# Altium PCB board.PcbDoc
Units mm, origin at the board's own origin, x right, y up, seen from the top; angles counter-clockwise.
Board outline 170 x 23.24 mm, 2 copper layers (Top Layer, Bottom Layer); 75 components, 36 nets, 289 pads, 344 vias.
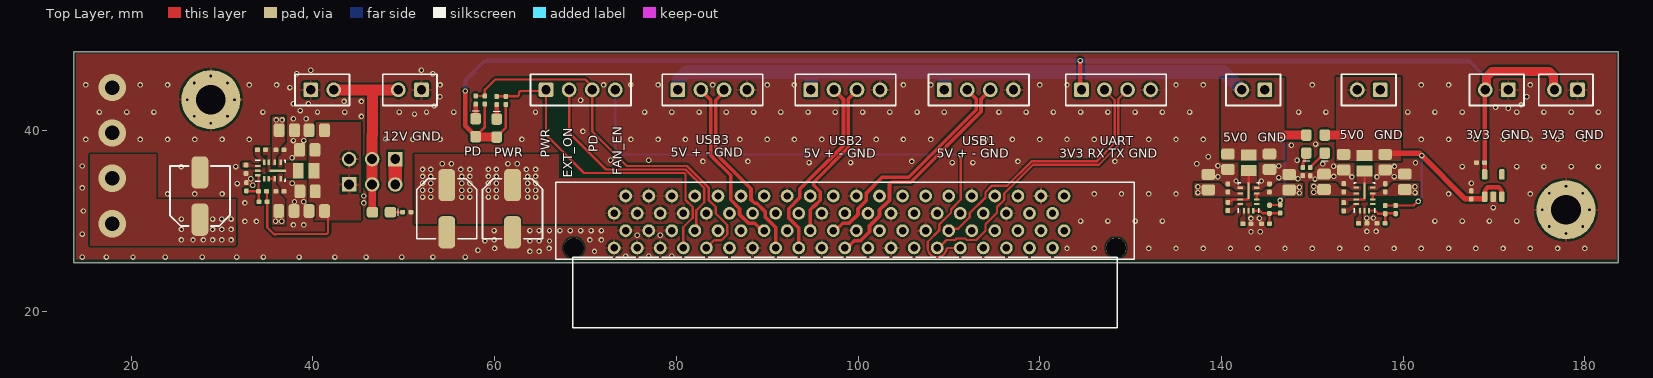
[diagram p0: Top Layer view]
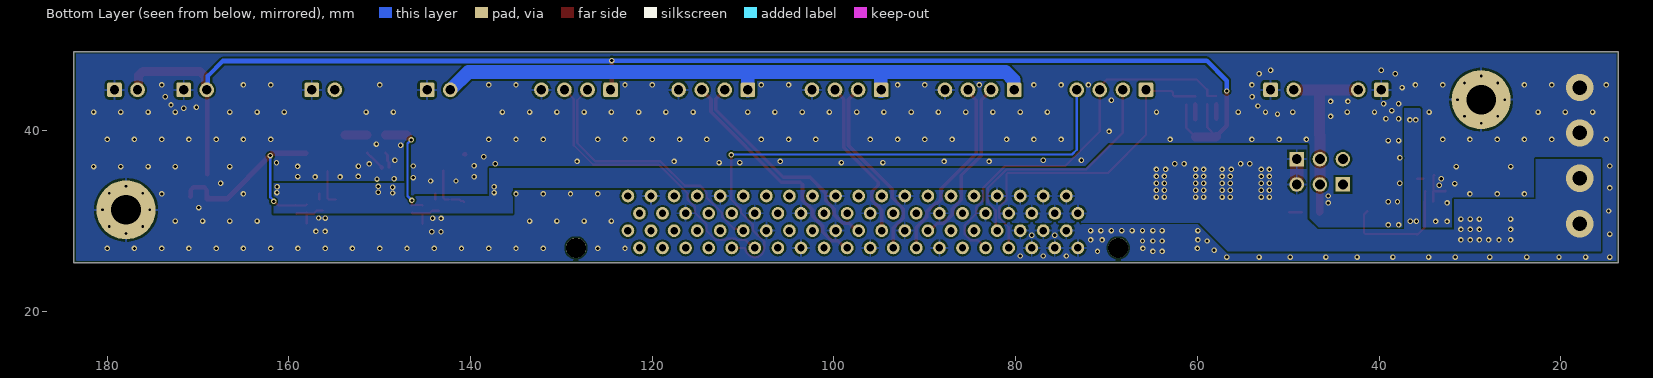
[diagram p1: Bottom Layer view, seen from below]
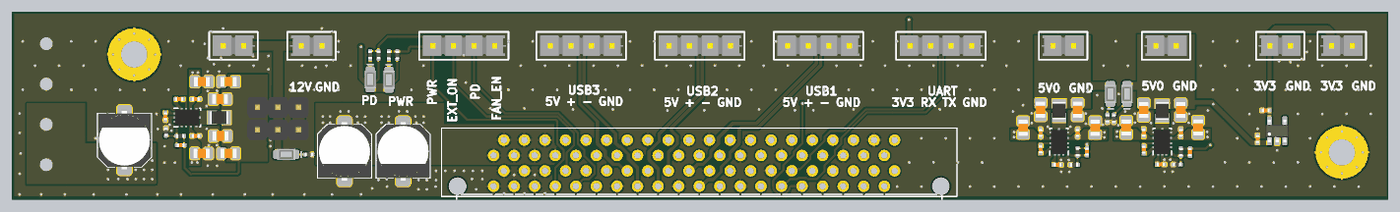
[diagram p2: 3D render of the assembled board from above, using the file's embedded part models]

## Layer stack, top to bottom
Top Solder: solder mask 0.0102, Solder Resist, Dk 3.5
Top Layer: signal copper 0.0356
Dielectric 1: dielectric 0.32, FR-4, Dk 4.8
Bottom Layer: signal copper 0.0356
Bottom Solder: solder mask 0.0102, Solder Resist, Dk 3.5

## Board outline
13.676,25.4 13.676,48.641 183.676,48.641 183.676,25.4

## Design rules (kind name [scope] priority, off if disabled: settings)
BoardOutlineClearance [All] p1: gap=0.2 ignorepadtopadclearanceinfootprint=FALSE except(0.4: Arc-SplitBarrior Arc-SplitContinuation Track-SplitBarrior Track-SplitContinuation SMDPad-SplitBarrior SMDPad-SplitContinuation THPad-SplitBarrior THPad-SplitContinuation Via-SplitBarrior Via-SplitContinuation Fill-SplitBarrior Fill-SplitContinuation Poly-SplitBarrior Poly-SplitContinuation Region-SplitBarrior Region-SplitContinuation Text-SplitBarrior Text-SplitContinuation)
Clearance "Clearance Bottom Layer" [OnLayer('Bottom Layer')] p1: gap=0.203 ignorepadtopadclearanceinfootprint=TRUE except(0.254: Arc-Text Track-Text SMDPad-Text THPad-Text Via-Text Fill-Text Poly-Text Region-Text Text-Text)
Clearance "Clearance Top Layer" [OnLayer('Top Layer')] p2: gap=0.203 ignorepadtopadclearanceinfootprint=TRUE except(0.127: Arc-Arc Arc-Track Track-Track; 0.254: Arc-Text Track-Text SMDPad-Text THPad-Text Via-Text Fill-Text Poly-Text Region-Text Text-Text)
Clearance [All] p3: gap=0.2 ignorepadtopadclearanceinfootprint=FALSE except(0.089: Arc-Arc Arc-Track Arc-SMDPad Track-Track Track-SMDPad SMDPad-SMDPad; 0.127: Arc-Via Track-Via SMDPad-Via THPad-Via Via-Via; 0.254: Arc-Text Track-Text SMDPad-Text THPad-Text Via-Text Fill-Text Poly-Text Region-Text Text-Text)
HoleSize [All] p1: absolutevalues=TRUE maxlimit=6.3 minlimit=0.2 maxpercent=80.000 minpercent=20.000
MinimumAnnularRing [All] p1: minimumring=0.076
MinimumSolderMaskSliver [All] p1: minsoldermaskwidth=0.1
PolygonConnect PolygonConnect_4 [All vs IsNamedPolygon('DIRCON')] p1: connectstyle=Direct reliefconductorwidth=0.254 reliefentries=4 polygonreliefangle="90 Angle" airgapwidth=0.254
PolygonConnect PolygonConnect_3 [All vs IsNamedPolygon('PWR_PLANE')] p2: thpad.connectstyle=Relief thpad.reliefconductorwidth=0.254 thpad.reliefentries=4 thpad.polygonreliefangle="90 Angle" thpad.airgapwidth=0.254 smdpad.connectstyle=Direct smdpad.reliefconductorwidth=0.254 smdpad.reliefentries=4 smdpad.polygonreliefangle="90 Angle" smdpad.airgapwidth=0.254 via.connectstyle=Direct via.reliefconductorwidth=0.254 via.reliefentries=4 via.polygonreliefangle="90 Angle" via.airgapwidth=0.254
PolygonConnect PolygonConnect_2 [All vs InNamedPolygon('PWR_PLANE')] p3: thpad.connectstyle=Relief thpad.reliefconductorwidth=0.254 thpad.reliefentries=4 thpad.polygonreliefangle="90 Angle" thpad.airgapwidth=0.254 smdpad.connectstyle=Direct smdpad.reliefconductorwidth=0.254 smdpad.reliefentries=4 smdpad.polygonreliefangle="90 Angle" smdpad.airgapwidth=0.254 via.connectstyle=Relief via.reliefconductorwidth=0.254 via.reliefentries=4 via.polygonreliefangle="90 Angle" via.airgapwidth=0.254
PolygonConnect [All] p4: connectstyle=Relief reliefconductorwidth=0.254 reliefentries=4 polygonreliefangle="90 Angle" airgapwidth=0.254
PolygonConnect PolygonConnect_1 [All vs InNamedPolygon('DIRCON')] p5: connectstyle=Direct reliefconductorwidth=0.508 reliefentries=4 polygonreliefangle="90 Angle" airgapwidth=0.254
RoutingCorners [All] p1: cornerstyle=Round minsetback=2.54 maxsetback=2.54
RoutingVias [All] p1: holewidth=0.5 width=1 viastyle="Through Hole" minholewidth=0.2 minwidth=0.45 maxholewidth=1 maxwidth=2
SilkToSilkClearance [All] p1: silktosilkclearance=0.1
SilkToSolderMaskClearance [IsPad] p1: minsilkscreentomaskgap=0.1 clearancetoexposedcopper=TRUE
SolderMaskExpansion [All] p1: expansion=0.102 istentingtop=FALSE
Width [All] p1: maxlimit=2.54 minlimit=0.089 preferedwidth=0.381
25 further rules are at their usual default settings.

## Components (designator, comment, footprint, x,y, rotation, side; value= is the part's Value field where it differs from the comment)
C1 "CAP MLCC 100nF 0402 10% 50V X5R" C0402N 153.456,31.576 r270 top
C2 "CAP MLCC 10uF 0805 10% 25V X5R" C0805N 160.177,34.336 r270 top
C3 "CAP MLCC 100nF 0402 10% 50V X5R" C0402N 153.456,33.677 r270 top
C4 "CAP MLCC 10uF 0805 10% 25V X5R" C0805N 151.297,34.331 r270 top
C5 "CAP MLCC 100nF 0402 10% 50V X5R" C0402N 158.028,33.666 r270 top
C6 "CAP MLCC 100nF 0402 10% 50V X5R" C0402N 159.171,31.264 r90 top
C7 "CAP MLCC 22uF 0805 10% 10V X5R" C0805N 153.456,36.49 r90 top
C8 "CAP MLCC 22uF 0805 10% 10V X5R" C0805N 158.028,36.49 r90 top
C9 "CAP MLCC 1uF 0402 10% 16V X5R" C0402N 155.558,29.752 r180 top
C10 "ECAP 100uF radial 20% 25V 0.7mohm" "New footprint 1"#1 54.737,31.369 r270 top
C11 "ECAP 100uF radial 20% 25V 0.7mohm" "New footprint 1"#1 27.559,32.766 r90 top
C12 "ECAP 100uF radial 20% 25V 0.7mohm" "New footprint 1"#1 61.976,31.369 r270 top
C13 "CAP MLCC 100nF 0402 10% 50V X5R" C0402N 140.716,31.622 r270 top
C14 "CAP MLCC 10uF 0805 10% 25V X5R" C0805N 138.557,34.289 r270 top
C15 "CAP MLCC 100nF 0402 10% 50V X5R" C0402N 140.716,33.654 r270 top
C16 "CAP MLCC 10uF 0805 10% 25V X5R" C0805N 147.447,34.289 r270 top
C17 "CAP MLCC 100nF 0402 10% 50V X5R" C0402N 145.288,33.654 r270 top
C18 "CAP MLCC 100nF 0402 10% 50V X5R" C0402N 146.454,31.335 r90 top
C19 "CAP MLCC 22uF 0805 10% 10V X5R" C0805N 145.288,36.536 r90 top
C20 "CAP MLCC 22uF 0805 10% 10V X5R" C0805N 140.716,36.536 r90 top
C21 "CAP MLCC 1uF 0402 10% 16V X5R" C0402N 142.806,29.718 r180 top
C22 "CAP MLCC 100nF 0402 10% 50V X5R" C0402N 34.329,37.846 r180 top
C23 "CAP MLCC 10uF 0805 10% 25V X5R" C0805N 37.123,40.005 r180 top
C24 "CAP MLCC 100nF 0402 10% 50V X5R" C0402N 36.361,37.846 r180 top
C25 "CAP MLCC 10uF 0805 10% 25V X5R" C0805N 37.084,31.115 r180 top
C26 "CAP MLCC 100nF 0402 10% 50V X5R" C0402N 36.361,33.274 r180 top
C27 "CAP MLCC 100nF 0402 10% 50V X5R" C0402N 34.514,32.131 r0 top
C28 "CAP MLCC 22uF 0805 10% 10V X5R" C0805N 39.37,37.846 r0 top
C29 "CAP MLCC 22uF 0805 10% 10V X5R" C0805N 39.409,33.274 r0 top
C30 "CAP MLCC 1uF 0402 10% 16V X5R" C0402N 32.633,35.708 r90 top
C31 "CAP MLCC 1uF 0402 10% 16V X5R" C0402N 167.513,32.893 r270 top
C32 "CAP MLCC 1uF 0402 10% 16V X5R" C0402N 168.529,36.449 r0 top
C33 "CAP MLCC 22uF 0805 10% 10V X5R" C0805N 40.425,31.115 r0 top
C34 "CAP MLCC 22uF 0805 10% 10V X5R" C0805N 40.425,40.005 r0 top
D1 "Hongbright_H2214AG72E0Z01" "New footprint 1"#2 151.384,38.481 r90 top
D2 "Hongbright_H2214AG72E0Z01" "New footprint 1"#2 149.352,38.481 r90 top
D3 "Hongbright_H2214AG72E0Z01" "New footprint 1"#2 47.537,30.988 r180 top
D4 "Hongbright_H2214AG72E0Z01" "New footprint 1"#2 57.912,40.285 r270 top
D5 "Hongbright_H2214AG72E0Z01" "New footprint 1"#2 60.223,40.242 r270 top
J1 "TX24-80R-LT-H1E" CON80_2X40_MR_TX24_JAE 98.552,25.908 r0 top
L1 "Inductor" INDC2016X10N 155.742,36.368 r90 top value="1.5 uH"
L2 "Inductor" INDC2016X10N 143.002,36.414 r90 top value="1.5 uH"
L3 "Inductor" INDC2016X10N 39.248,35.56 r0 top value=3.3uH
P1 "SAMTEC_TSW-102-07-F-S" SAMTEC-TSW-102-07-X-S 41.021,44.45 r0 top
P3 "SAMTEC_TSW-102-07-F-S" SAMTEC-TSW-102-07-X-S 50.671,44.45 r180 top
P6 "SAMTEC_TSW-102-07-F-S" SAMTEC-TSW-102-07-X-S 156.21,44.45 r180 top
P7 "WÜRTH_61300311121" 61300311121 46.521,36.83 r180 top
P8 "WÜRTH_61300311121" 61300311121 46.521,34.036 r0 top
P9 "SAMTEC_TSW-102-07-F-S" SAMTEC-TSW-102-07-X-S 143.51,44.45 r180 top
P11 "SAMTEC_TSW-104-07-F-S" SAMTEC-TSW-104-07-X-S 69.469,44.45 r0 top
P12 "SAMTEC_TSW-104-07-F-S" SAMTEC-TSW-104-07-X-S 113.291,44.45 r0 top
P13 "SAMTEC_TSW-104-07-F-S" SAMTEC-TSW-104-07-X-S 98.615,44.45 r0 top
P14 "SAMTEC_TSW-102-07-F-S" SAMTEC-TSW-102-07-X-S 177.927,44.45 r180 top
P15 "SAMTEC_TSW-104-07-F-S" SAMTEC-TSW-104-07-X-S 83.974,44.45 r0 top
P16 "SAMTEC_TSW-102-07-F-S" SAMTEC-TSW-102-07-X-S 170.307,44.45 r180 top
P17 "SAMTEC_TSW-104-07-F-S" SAMTEC-TSW-104-07-X-S 128.397,44.45 r0 top
R1 "RES 100k 0402 1% 63mW" R0402N 158.028,31.264 r90 top
R2 "RES 100k 0402 1% 63mW" R0402N 149.77,35.446 r90 top
R3 "RES 100k 0402 1% 63mW" R0402N 157.564,29.745 r0 top
R4 "RES 100k 0402 1% 63mW" R0402N 145.288,31.299 r90 top
R5 "RES 100k 0402 1% 63mW" R0402N 148.967,35.462 r90 top
R6 "RES 100k 0402 1% 63mW" R0402N 144.849,29.718 r0 top
R7 "RES 100k 0402 1% 63mW" R0402N 34.456,33.274 r0 top
R8 "RES 100k 0402 1% 63mW" R0402N 50.331,30.988 r180 top
R9 "RES 100k 0402 1% 63mW" R0402N 32.678,33.782 r270 top
R10 "RES 100k 0402 1% 63mW" R0402N 58.928,43.333 r270 top
R11 "RES 100k 0402 1% 63mW" R0402N 61.239,43.29 r270 top
R12 "RES 100k 0402 1% 63mW" R0402N 57.912,43.333 r270 top
R13 "RES 100k 0402 1% 63mW" R0402N 60.223,43.29 r270 top
U1 "Part Number: LMR33620ARNXR" RNX12 155.742,32.566 r0 top value=Value
U2 "Part Number: LMR33620ARNXR" RNX12 142.991,32.559 r0 top value=Value
U3 "Part Number: LMR33620ARNXR" RNX12 35.319,35.56 r270 top value=Value
U4 "TI_TLV75533PDBVR" SOT23-5P95_280X145L45X40N 169.926,33.909 r0 top
? "Comment" MTGP650H325V8H30 28.764,43.372 r0 top
? "Comment" MTGP650H325V8H30 177.927,31.242 r0 top

## Footprints (in the part's own frame and the unit in brackets; to place one, negate y for a bottom-side part, rotate by r counter-clockwise, add the part's x,y. Pads: shape width x height; smd on the part's side, far side on the other; paste and mask are expansions set on the pad)
61300311121 [mm] "Pin Header, pitch 2.54 mm, THT, Vertical, single row, 3p"
  rect 1.6x1.6 hole 1.1: 1(-2.54,0)
  round 1.6 hole 1.1: 2(0,0) 3(2.54,0)
  body extent -3.81,-1.27 3.81,1.27, height 8.57
C0402N [mm] "Capacitor, Chip; 1.00 mm L X 0.50 mm W X 0.60 mm H body"
  rrect50% 0.555x0.505 smd: 1(-0.45,0) 2(0.45,0)
  body extent -0.5,-0.25 0.5,0.25, height 0.6
C0805N [mm] "Capacitor, Chip; 2.00 mm L X 1.20 mm W X 1.52 mm H body"
  rrect42% 1.2x1.5 smd: 1(-0.85,0) 2(0.85,0)
  body extent -1,-0.6 1,0.6, height 1.52
CON80_2X40_MR_TX24_JAE [mil]
  round 55 hole 32 mask+0: 1(950,270) 2(900,195) 3(850,270) 4(800,195) 5(750,270) 6(700,195) 7(650,270) 8(600,195) 9(550,270) 10(500,195) 11(450,270) 12(400,195) 13(350,270) 14(300,195) 15(250,270) 16(200,195) 17(150,270) 18(100,195) 19(50,270) 20(0,195) 21(-50,270) 22(-100,195) 23(-150,270) 24(-200,195) 25(-250,270) 26(-300,195) 27(-350,270) 28(-400,195) 29(-450,270) 30(-500,195) 31(-550,270) 32(-600,195) 33(-650,270) 34(-700,195) 35(-750,270) 36(-800,195) 37(-850,270) 38(-900,195) 39(-950,270) 40(-1000,195) 41(950,120) 42(900,45) 43(850,120) 44(800,45) 45(750,120) 46(700,45) 47(650,120) 48(600,45) 49(550,120) 50(500,45) 51(450,120) 52(400,45) 53(350,120) 54(300,45) 55(250,120) 56(200,45) 57(150,120) 58(100,45) 59(50,120) 60(0,45) 61(-50,120) 62(-100,45) 63(-150,120) 64(-200,45) 65(-250,120) 66(-300,45) 67(-350,120) 68(-400,45) 69(-450,120) 70(-500,45) 71(-550,120) 72(-600,45) 73(-650,120) 74(-700,45) 75(-750,120) 76(-800,45) 77(-850,120) 78(-900,45) 79(-950,120) 80(-1000,45)
  round 87 hole 87 unplated: 81(-1175,45) 82(1175,45)
  silkscreen extent -1253,-300 1253,329, body extent 0,-10 10,0, height 10
INDC2016X10N [mm] "Chip Inductor, 2-Leads, Body 2,00x1,60mm, IPC Medium Density"
  rect 1.19x1.73 smd: 1(-0.855,0) 2(0.855,0)
  body extent -1.1,-0.81 1.1,0.81, height 1
MTGP650H325V8H30 [mm] "Mounting Hole, Plated; 6.50 mm Pad, 3.25 mm Hole (with 8 vias)"
  round 0.6 hole 0.301: 1(-2.6,0) 1(-1.84,-1.84) 1(-1.84,1.84) 1(0,-2.6) 1(0,2.6) 1(1.84,-1.84) 1(1.84,1.84) 1(2.6,0)
  round 6.5 hole 3.25 paste-6.5: 1(0,0)
"New footprint 1"#1 [mm]
  rrect50% 3.55x1.85 smd: 1(-2.6,0) 2(2.6,0)
  silkscreen extent -3.3,-3.3 3.3,3.3, body extent -3.6,-3.3 3.6,3.3, height 8
"New footprint 1"#2 [mm]
  rrect43% 1.25x1.16 smd: 1(0.99,0) 2(-0.99,0)
  silkscreen extent -1.84,-0.38 -1.84,0.38, body extent -1.1,-0.7 1.1,0.7, height 1.28
R0402N [mm] "Resistor, Chip; 1.00 mm L X 0.50 mm W X 0.40 mm H body"
  rrect50% 0.555x0.505 smd: 1(-0.45,0) 2(0.45,0)
  body extent -0.5,-0.25 0.5,0.25, height 0.4
RNX12 [mm] "RNX0012B"
  rect 0.6x0.25 smd paste+0 mask+0: 1(-0.9,1.125) 2(-0.9,0.475) 3(-0.9,-0.175) 4(-0.9,-0.675) 8(0.9,-0.675) 9(0.9,-0.175) 10(0.9,0.475) 11(0.9,1.125)
  rect 0.25x0.6 smd paste+0 mask+0: 5(-0.5,-1.4) 6(0,-1.4) 7(0.5,-1.4)
  rect 0.25x1.825 smd paste-0.9 mask+0: 12(0,0.788)
  silkscreen extent -1.14,-1.65 1.14,1.65, body extent -1.02,-1.52 0.98,1.48, height 0.91
SAMTEC-TSW-102-07-X-S [mm] "PCB Header Strips, 2-Leads, Body 5,08x2,54mm, 0.100\" pitch"
  rrect25% 1.62x1.62 hole 1.02: 1(-1.27,0)
  round 1.62 hole 1.02: 2(1.27,0)
  silkscreen extent -2.99,-1.72 2.99,1.72, body extent -2.54,-1.27 2.67,1.27, height 8.38
SAMTEC-TSW-104-07-X-S [mm] "PCB Header Strips, 4-Leads, Body 10,16x2,54mm, 0.100\" pitch"
  rrect25% 1.62x1.62 hole 1.02: 1(-3.81,0)
  round 1.62 hole 1.02: 2(-1.27,0) 3(1.27,0) 4(3.81,0)
  silkscreen extent -5.53,-1.72 5.53,1.72, body extent -5.08,-1.27 5.21,1.27, height 8.38
SOT23-5P95_280X145L45X40N [mm] "Small Outline Transistor (SOT23), 0.95 mm pitch; 5 pin, 2.90 mm L X 1.60 mm W X 1.45 mm H body"
  rrect49% 0.61x1.16 smd: 1(-0.95,-1.23) 2(0,-1.23) 3(0.95,-1.23) 4(0.95,1.23) 5(-0.95,1.23)
  body extent -1.45,-1.4 1.45,1.4, height 1.45

## Part data
C1 C6 C13 C18 C22 C27: library part CMP-02799-2, "Capacitor, MLCC, 100nF, 0402, 10%, 50V, X5R", Component Tolerance=10%, Component Value=100nF, Dielectric=X5R, Operating Temperature (°C)="-55 to +85", Package=0402, Voltage Rating=50V, TC ID=50021748
C2 C4 C14 C16 C23 C25: library part CMP-02808-3, "Capacitor, MLCC, 10uF, 0805, 10%, 25V, X5R", Component Tolerance=10%, Component Value=10µF, Dielectric=X5R, Operating Temperature (°C)="-55 to +85", Package=0805, Voltage Rating=25V, TC ID=50016549
C3 C5 C15 C17 C24 C26: library part CMP-02799-2, "Capacitor, MLCC, 100nF, 0402, 10%, 50V, X5R", Component Tolerance=10%, Component Value=220nF, Dielectric=X5R, Operating Temperature (°C)="-55 to +85", Package=0402, Voltage Rating=50V, TC ID=50021748
C7 C8 C19 C20: library part CMP-02864-4, "Capacitor, MLCC, 22uF, 0805, 10%, 10V, X5R", Component Tolerance=10%, Component Value=22µF, Dielectric=X5R, Operating Temperature (°C)="-55 to +85", Package=0805, Voltage Rating=10V, TC ID=50024017
C9 C21 C30 C31 C32: library part CMP-02807-3, "Capacitor, MLCC, 1uF, 0402, 10%, 16V, X5R", Component Tolerance=10%, Component Value=1µF, Dielectric=X5R, Operating Temperature (°C)="-55 to +125", Package=0402, Voltage Rating=16V, TC ID=50021750
C10 C11 C12: library part CMP-02868-3, "Electrolytic capacitor, 100uF, radial, 20%, 25V, 0.7mohm", Component Tolerance=20%, Component Value=100µF, Manufacturer 1=Rubycon, Manufacturer Part Number 1=25TRV100M6.3X8, Operating Temperature (°C)="-40 to +105", Voltage Rating=25V, Datasheet=http://www.rubycon.co.jp/en/catalog/e_pdfs/aluminum/e_TRV.pdf, TC ID=50020370
C28 C29 C33 C34: library part CMP-02864-4, "Capacitor, MLCC, 22uF, 0805, 10%, 10V, X5R", Component Tolerance=10%, Component Value=10uF, Dielectric=X5R, Operating Temperature (°C)="-55 to +85", Package=0805, Voltage Rating=10V, TC ID=50024017
D1 D2 D3 D4 D5: library part CMP-004-00012-6, "Green LED, VFmax 3.6V", Manufacturer 1=Hongbright, Manufacturer Part Number 1=H2214AG72E0Z01, Operating Temperature (°C)="-40 to +100"
J1: "No Description Available", Built_By=EMA_UL_Team, Copyright="Copyright (C) 2018 Accelerated Designs. All rights reserved", Manufacturer_Part_Number=TX24-80R-LT-H1E, RefDes=RefDes, SourceLibrary=JAE_2009-02-18, Type=DEV, Vendor="JAE Electronics"
P1 P3 P6 P9 P14 P16: library part CMP-03065-1, "CONN HEADER VERT 2POS 2.54MM", Manufacturer 1="Samtec Inc.", Manufacturer Part Number 1=TSW-102-07-F-S, Operating Temperature (°C)="-55 to +125", Datasheet=http://suddendocs.samtec.com/catalog_english/tsw_th.pdf, TC ID=50025272
P7 P8: library part CMP-018-0014-3, "Board Connector, 3 Contact(s), 1 Row(s), Male, Straight, 0.1 inch Pitch, Solder Terminal, Locking, Black Insulator, Plug", Manufacturer 1=Würth, Manufacturer Part Number 1=61300311121, Operating Temperature (°C)="-40 to +125"
P11 P12 P13 P15 P17: library part CMP-03066-1, "CONN HEADER VERT 4POS 2.54MM", Manufacturer 1="Samtec Inc.", Manufacturer Part Number 1=TSW-104-07-F-S, Operating Temperature (°C)="-55 to +125", Datasheet=http://suddendocs.samtec.com/catalog_english/tsw_th.pdf, TC ID=50025274
R1 R4 R7: library part CMP-02821-5, "Resistor, 100k, 0402, 1%, 63mW", Component Tolerance=1%, Component Value=100k, Operating Temperature (°C)="-55 to +125", Package=0402, Power Rating=63mW, TC ID=50020637
R2 R5 R12 R13: library part CMP-02821-5, "Resistor, 100k, 0402, 1%, 63mW", Component Tolerance=1%, Component Value=200, Operating Temperature (°C)="-55 to +125", Package=0402, Power Rating=63mW, TC ID=50020637
R3 R6: library part CMP-02821-5, "Resistor, 100k, 0402, 1%, 63mW", Component Tolerance=1%, Component Value=43.2k, Operating Temperature (°C)="-55 to +125", Package=0402, Power Rating=63mW, TC ID=50020637
R8: library part CMP-02821-5, "Resistor, 100k, 0402, 1%, 63mW", Component Tolerance=1%, Component Value=800, Operating Temperature (°C)="-55 to +125", Package=0402, Power Rating=63mW, TC ID=50020637
R9: library part CMP-02821-5, "Resistor, 100k, 0402, 1%, 63mW", Component Tolerance=1%, Component Value=9.09k, Operating Temperature (°C)="-55 to +125", Package=0402, Power Rating=63mW, TC ID=50020637
R10 R11: library part CMP-02821-5, "Resistor, 100k, 0402, 1%, 63mW", Component Tolerance=1%, Component Value=10k, Operating Temperature (°C)="-55 to +125", Package=0402, Power Rating=63mW, TC ID=50020637
U1 U2 U3: library part LMR33620, "SIMPLE SWITCHER® 3.8V to 36V, 2A Synchronous Buck Converter With Ultra-Low EMI", Manufacturer="Texas Instruments", PartNumber=LMR33620ARNXR, RefDes=RefDes, Type=TYPE
U4: library part CMP-02789-4, "Fixed Positive LDO Regulator, 3.3V, 0.238V Dropout, PDSO5", Manufacturer 1="Texas Instruments", Manufacturer Part Number 1=TLV75533PDBVR, Operating Temperature (°C)="-40 to +125", Package=SOT-23-5, TC ID=50021849
L1 L2 L3: Code_IEC=1005, Code_JEITA=0402, LatestRevisionDate=29-May-2009, LatestRevisionNote="IPC-7351 Footprint Added.", PackageDescription="Chip Inductor", PackageReference=0402-A, Published=8-Jun-2000, Publisher="Altium Limited"

## Via types
v1: diameter 0.6, hole 0.35, Top Layer to Bottom Layer, tented both sides, 340 vias
v2: diameter 3, hole 1.6, Top Layer to Bottom Layer, 4 vias

## Nets (pads, with @x,y where several pads share a name; then routed paths per layer and width w, separated by ;. In a path a pad name is that pad's centre, name@x,y a point inside that pad or via, vN(x,y) a via of type N, cw(c..) or ccw(c..) an arc to the next point about the centre after c; other vN are vias at no path point)
GND: ?.1 C2.1 C3.1 C4.1 C5.1 C7.1 C8.1 C9.1 C10.2 C11.2 C12.2 C14.1 C15.1 C16.1 C17.1 C19.1 C20.1 C21.1 C23.1 C24.1 C25.1 C26.1 C28.1 C29.1 C30.1 C31.1 C32.1 C33.1 C34.1 J1.3 J1.6 J1.9 J1.12 J1.16 J1.19 J1.22 J1.25 J1.28 J1.32 J1.53 J1.56 J1.59 J1.62 J1.65 J1.68 J1.75 J1.76 J1.77 J1.78 J1.79 J1.80 P1.1 P3.1 P6.1 P9.1 P12.4 P13.4 P14.1 P15.4 P16.1 P17.4 R2.1 R3.1 R5.1 R6.1 R8.1 R9.1 U1.1 U1.6 U1.11 U2.1 U2.6 U2.11 U3.1 U3.6 U3.11 U4.2
  other v1: 14.605,26.035 17.272,26.035 20.193,26.035 23.749,26.035 27.813,26.035 31.623,26.035 34.544,26.035 38.481,26.035 42.418,26.035 45.847,26.035 49.784,26.035 53.213,26.035 56.769,26.035 74.422,26.162 76.962,26.162 79.502,26.162 63.881,26.67 64.897,26.67 70.993,26.67 58.166,26.797 60,27 66,27 123,27 126,27 132,27 135,27 138,27 141,27 144,27 147,27 150,27 153,27 156,27 159,27 162,27 165,27 168,27 171,27 174,27 177,27 180,27 58.928,27.813 63.881,27.813 64.897,27.813 66.04,27.813 59.944,27.94 70.485,27.94 71.755,27.94 75.692,28.448 78.232,28.448 14.605,28.575 143.256,28.829 144.272,28.829 156.008,28.863 157.024,28.863 59.944,28.956 63.881,28.956 64.897,28.956 66.04,28.956 67.183,28.956 68.326,28.956 69.469,28.956 70.612,28.956 71.755,28.956 37.846,29.591 38.989,29.591 32.512,29.972 33.782,29.972 124.5,30 127.5,30 130.5,30 133.5,30 163.5,30 166.5,30 169.5,30 172.5,30 143.242,30.307 144.175,30.326 155.994,30.342 156.724,30.344 14.732,31.115 169.926,31.496 32.512,32.004 45.593,32.004 37.973,32.131 38.989,32.131 45.593,32.766 24,33 27,33 30,33 126,33 129,33 132,33 135,33 165,33 174,33 14.605,33.655 33.367,33.945 31.676,34.138 37.719,34.163 167.513,34.163 141.605,34.417 144.399,34.417 150.298,34.621 148.416,34.657 33.147,34.671 146.304,34.798 157.12,34.861 139.606,34.881 154.363,34.874 159.025,34.901 152.364,34.928 25.5,36 31.5,36 166.5,36 172.5,36 175.5,36 178.5,36 181.5,36 159.044,36.022 152.346,36.048 14.605,36.068 146.304,36.068 139.606,36.094 151.152,36.3 137.287,36.322 161.362,36.436 94.615,36.449 99.187,36.449 110.363,36.449 112.649,36.449 82.931,36.576 87.884,36.576 105.918,36.576 117.602,36.576 128.27,36.576 72.771,36.703 76.962,36.703 148.336,36.703 37.699,36.97 138.557,37.084 147.701,38.354 150.368,38.481 37.846,38.862 38.989,38.862 15,39 21,39 24,39 27,39 30,39 33,39 48,39 51,39 54,39 63,39 75,39 78,39 81,39 87,39 90,39 93,39 96,39 102,39 105,39 108,39 114,39 117,39 120,39 123,39 126,39 132,39 135,39 138,39 162,39 165,39 168,39 171,39 174,39 177,39 180,39 69.723,39.878 37.846,41.275 39.243,41.275 45.339,41.529 51.181,41.783 16.5,42 19.5,42 22.5,42 34.5,42 40.5,42 43.5,42 49.5,42 52.5,42 55.5,42 64.5,42 76.5,42 79.5,42 82.5,42 85.5,42 88.5,42 91.5,42 94.5,42 97.5,42 100.5,42 103.5,42 106.5,42 109.5,42 115.5,42 118.5,42 121.5,42 124.5,42 127.5,42 130.5,42 133.5,42 136.5,42 148.5,42 151.5,42 160.5,42 163.5,42 166.5,42 172.5,42 175.5,42 178.5,42 181.5,42 38.608,42.164 171.577,42.418 170.18,42.545 53.34,42.672 172.974,42.799 37.846,42.926 39.497,42.926 43.434,43.18 45.339,43.18 69.469,43.307 53.975,43.688 173.609,43.688 37.465,44.704 15,45 21,45 24,45 33,45 36,45 54,45 72,45 75,45 78,45 84,45 90,45 93,45 105,45 108,45 120,45 123,45 135,45 138,45 150,45 162,45 165,45 174,45 38.227,46.228 53.213,46.228 39.751,46.609 51.943,46.609
  other v2: 17.907,39.709 17.907,44.704
NetC1_1: C1.1 L1.1 U1.3 U1.12 | length 3.9
  Top Layer w0.254: U1.3 155.592,32.391 155.74,32.54 155.74,33.352 U1.12 L1.1
NetC1_2: C1.2 U1.4
NetC6_1: C6.1 R1.1 R3.2 U1.7 | length 4.3
  Top Layer w0.254: U1.7 156.921,31.166 157.273,30.814 R1.1 158.075,30.861 159.125,30.861 C6.1 ; R3.2 158.021,29.752 R1.1@158.021,30.934
NetC9_2: C9.2 U1.5
NetC13_1: C13.1 L2.1 U2.3 U2.12 | length 5.2
  Top Layer w0.254: C13.1 140.716,32.097 140.842,32.223 141.062,32.223 141.223,32.384 U2.3 ; U2.3@142.367,32.39 142.842,32.39 142.991,32.539 142.991,34.131 143.002,34.142 L2.1
NetC13_2: C13.2 U2.4
NetC18_1: C18.1 R4.1 R6.2 U2.7 | length 4.2
  Top Layer w0.254: U2.7 144.228,31.159 144.526,30.861 145.276,30.861 R4.1 ; R6.2 145.293,29.723 145.293,30.844 R4.1 ; C18.1@146.431,30.918 146.397,30.884 145.323,30.884 R4.1
NetC21_2: C21.2 U2.5
NetC22_1: C22.1 L3.1 U3.3 U3.12
NetC22_2: C22.2 U3.4
NetC27_1: C27.1 R7.1 R9.2 U3.7 | length 4.4
  Top Layer w0.254: R9.2 32.707,33.303 33.977,33.303 R7.1 ; U3.7 34.004,35.06 34.006,35.058 R7.1 ; C27.1 34.035,32.16 34.035,33.245 R7.1
NetC27_2: C27.2 C28.2 C29.2 C33.2 C34.2 L3.2 P7.3 P8.1 R7.2 | length 13.6
  Top Layer w0.254: R7.2 34.935,33.245 34.935,32.16 C27.2 34.964,31.242 34.964,29.298 35.709,28.553 35.919,28.553 35.941,28.575 41.507,28.575 41.656,28.724 41.656,30.734 C33.2
NetC30_2: C30.2 U3.5
NetD1_2: D1.2 R2.2 | length 2.3
  Top Layer w0.3: R2.2 149.77,35.905 149.77,35.921 150.926,37.077 150.97,37.077 D1.2
  Top Layer w0.5: R2.2@149.767,35.907 R2.2@149.77,35.905
NetD2_2: D2.2 R5.2 | length 1.7
  Top Layer w0.3: R5.2 148.967,36.036 148.971,36.04 148.971,36.449 149.135,36.613 149.135,37.274 D2.2
NetD3_2: D3.2 R8.2 | length 1.4
  Top Layer w0.254: D3.2 R8.2
NetD4_2: D4.2 R12.2 | length 1.6
  Top Layer w0.5: D4.2 R12.2
NetD5_2: D5.2 R13.2 | length 1.6
  Top Layer w0.5: D5.2 R13.2
NetJ1_50: J1.50 P11.4 | length 61.3
  Top Layer w0.254: J1.50 109.864,27.051 109.79,26.977 109.732,26.919 cw(c108.712,27.051) 107.685,26.992 ccw(c107.431,26.976) 107.684,27 107.675,27.094 cw(c107.928,27.118) 107.674,27.116 107.674,27.733 108.953,29.012 108.953,29.647 110.223,30.917 110.223,31.287 111.309,32.373 v1(111.309,37.29)
  Bottom Layer w0.254: P11.4 73.279,37.846 73.787,37.338 111.261,37.338 v1(111.309,37.29)
NetJ1_51: J1.51 P17.2 | length 29.2
  Top Layer w0.254: J1.51 110.201,29.175 111.021,29.175 112.281,30.435 112.281,30.874 114.023,32.616 114.023,33.182 114.75,33.909 116.428,33.909 119.095,36.576 126.238,36.576 128.27,38.608 128.27,43.307 P17.2
NetJ1_52: J1.52 P17.3 | length 32.5
  Top Layer w0.254: J1.52 108.87,27.051 109.746,27.927 110.673,27.927 110.826,28.08 111.811,28.08 111.963,27.927 113.017,27.927 114.033,28.943 114.033,29.647 115.303,30.917 115.303,31.552 116.091,32.34 116.091,33.033 119.253,36.195 126.492,36.195 128.651,38.354 128.651,43.434 P17.3
NetJ1_60: J1.60 P12.3 | length 25.8
  Top Layer w0.4: J1.60 98.782,27.051 99.585,27.854 100.278,27.854 101.26,28.836 101.26,29.471 102.362,30.573 102.362,31.242 102.784,31.664 102.818,31.664 103.464,32.31 103.464,34.056 103.698,34.29 105.791,34.29 113.538,42.037 113.538,43.427 P12.3
NetJ1_61: J1.61 P12.2 | length 24.7
  Top Layer w0.4: J1.61 97.512,28.956 98.315,29.759 99.008,29.759 99.99,30.741 99.99,31.376 100.924,32.31 100.924,33.106 102.635,34.817 105.573,34.817 113.011,42.255 113.011,43.446 112.021,44.437 P12.2
NetJ1_63: J1.63 P13.3 | length 18.2
  Top Layer w0.4: J1.63 94.742,31.242 95.164,31.664 95.198,31.664 95.844,32.31 95.844,33.222 95.115,33.951 95.115,34.282 98.933,38.1 98.933,43.434 99.885,44.386 P13.3
NetJ1_64: J1.64 P13.2 | length 20.8
  Top Layer w0.4: J1.64 93.472,29.244 92.37,30.346 92.37,31.376 93.599,32.605 93.599,33.528 98.406,38.335 98.406,43.389 P13.2
NetJ1_66: J1.66 P15.3 | length 20.6
  Top Layer w0.4: P15.3 85.244,44.223 84.328,43.307 84.328,37.448 88.224,33.553 88.224,32.385 88.646,31.963 88.848,31.963 89.806,31.005 89.806,30.429 90.932,29.303 J1.66
NetJ1_67: J1.67 P15.2 | length 18.7
  Top Layer w0.4: P15.2@82.804,44.323 83.801,43.326 83.801,37.23 85.979,35.052 85.979,32.351 86.954,31.376 86.954,30.741 87.936,29.759 88.629,29.759 89.432,28.956 J1.67
NetJ1_72: J1.72 P11.3 R10.1 R12.1 | length 43.5
  Top Layer w0.254: R12.1 R10.1 58.928,44.45 60.071,45.593 69.977,45.593 70.157,45.413 70.157,45.402 70.739,44.82 P11.3 70.739,39.878 74.549,36.068 81.18,36.068 83.553,33.695 83.553,32.34 84.341,31.552 84.341,30.848 85.611,29.578 85.611,28.53 84.981,27.9 84.161,27.9 J1.72
NetJ1_73: J1.73 P11.2 | length 27.2
  Top Layer w0.254: P11.2 68.199,39.751 72.263,35.687 81.022,35.687 83.071,33.639 83.071,32.075 82.182,31.186 82.182,29.096 J1.73
NetJ1_74: J1.74 P11.1 R11.1 R13.1 | length 36.8
  Top Layer w0.254: R13.1 R11.1 62.537,43.74 62.686,43.889 62.686,44.174 62.835,44.323 P11.1@65.659,44.323 ; P11.1 P11.1@65.659,44.323 ; J1.74 80.772,29.337 81.801,30.366 81.801,31.552 81.013,32.34 81.013,35.157 80.865,35.306 69.85,35.306 65.659,39.497 P11.1@65.659,44.323
VDD_3V3: C32.2 D4.1 D5.1 P14.2 P16.2 P17.1 R10.2 R11.2 U4.5 | length 155.9
  Top Layer w0.254: D4.1 57.912,39.34 58.928,40.356 R10.2 ; D5.1@60.202,39.273 61.239,40.311 R11.2
  Top Layer w0.5: v1(56.769,44.323) 56.769,40.483 D4.1@57.912,39.34 ; v1(124.46,47.675) 124.479,47.656 124.479,44.558 P17.1 ; U4.5 C32.2@168.976,36.573 ; C32.2 169.004,36.449 169.006,36.452 169.006,44.419 P16.2
  Top Layer w1: D4.1 57.934,39.273 60.202,39.273 D5.1 ; P16.2 169.156,44.569 169.156,45.839 169.799,46.482 176.071,46.482 176.538,46.015 176.538,44.569 P14.2
  Bottom Layer w0.5: v1@56.796,44.323 v1(56.769,44.323) 56.769,45.466 58.978,47.675 v1(124.46,47.675) ; v1@124.46,47.625 167.259,47.625 168.91,45.974 168.91,44.577 P16.2
VDD_5V_1: C6.2 C7.2 C8.2 C31.2 D1.1 L1.2 P6.2 R1.2 U4.1 U4.3 | length 28.3
  Top Layer w0.254: R1.2@158.028,31.841 158.028,31.84 158.154,31.714 C6.2 ; C8.2 C8.2@158.138,37.45 ; C6.2@159.263,31.75 159.263,31.749 159.297,31.714 161.155,31.714 161.605,32.164 v1(161.668,32.164)
  Top Layer w0.5: U4.1 169.031,32.734 169.031,33.419 169.324,33.712 170.528,33.712 170.821,33.419 170.821,32.734 U4.3
  Top Layer w0.6: C8.2@158.138,37.45 161.813,37.45 v1(162.052,37.211) 166.82,32.443 C31.2 168.971,32.443 168.976,32.448 U4.1
  Top Layer w1: D1.1 153.771,39.471 153.797,39.497
  Bottom Layer w0.254: v1(161.668,32.164) 161.668,32.258 162.052,32.642 v1(162.052,37.211)
VDD_5V_2: C18.2 C19.2 C20.2 D2.1 L2.2 P9.2 P12.1 P13.1 P15.1 R4.2 | length 79.2
  Top Layer w0.254: R4.2 145.323,31.784 146.397,31.784 146.431,31.818 C18.2@146.452,31.797 ; v1(146.452,32.281) C18.2@146.452,31.797 ; C18.2 146.452,31.787 C18.2@146.452,31.797 ; C18.2@146.499,31.75 C18.2@146.452,31.797 ; D2.1@149.352,39.426 D2.1
  Top Layer w0.5: C20.2@140.565,37.386 C20.2
  Top Layer w1: 146.939,39.37 147.04,39.471 D2.1
  Bottom Layer w0.254: v1(146.452,32.281) 146.939,32.768 146.939,38.533 v1(146.531,38.941)
  Bottom Layer w1.5: P15.1 80.224,44.51 80.224,45.543 81.103,46.422 94.866,46.422 ; P13.1@94.805,44.314 94.866,44.374 94.866,46.422 ; P12.1@109.474,44.333 109.474,45.603 ; P9.2 142.208,44.45 140.236,46.422 94.866,46.422
VDD_12V: D3.1 P1.2 P3.2 P7.2 P8.2 | length 20.6
  Top Layer w0.8: P8.2 46.534,34.023 46.534,31.001 D3.1
  Top Layer w1.2: P1.2@42.291,44.441 46.609,44.441 ; P8.2 P7.2 46.521,39.476 46.542,39.497 46.547,39.497 46.547,44.379 46.609,44.441 ; P3.2@49.401,44.441 46.609,44.441
VDD_IN: C2.2 C3.2 C4.2 C5.2 C10.1 C11.1 C12.1 C14.2 C15.2 C16.2 C17.2 C23.2 C24.2 C25.2 C26.2 J1.33 J1.34 J1.35 J1.36 J1.37 J1.38 J1.39 J1.40 P7.1 P8.3 U1.2 U1.9 U1.10 U2.2 U2.9 U2.10 U3.2 U3.9 U3.10 | length 4.7
  Top Layer w0.254: U3.9 U3.10 ; U2.9 U2.10 ; U1.9 U1.10
  Top Layer w1.5: P8.3 P7.1
  other v1: 25.527,27.94 26.797,27.94 27.94,27.94 28.956,27.94 29.972,27.94 30.988,27.94 25.527,29.083 28.956,29.083 29.972,29.083 30.988,29.083 36.558,29.98 35.889,29.996 25.527,30.226 28.956,30.226 29.972,30.226 30.988,30.226 52.07,32.639 52.959,32.639 56.388,32.639 57.277,32.639 59.309,32.639 60.198,32.639 63.627,32.639 64.516,32.639 148.59,33.097 137.414,33.147 161.32,33.143 150.154,33.189 52.07,33.401 52.959,33.401 56.388,33.401 57.277,33.401 59.309,33.401 60.198,33.401 63.627,33.401 64.516,33.401 148.59,33.732 137.414,33.782 161.29,33.782 150.154,33.824 52.07,34.163 52.959,34.163 56.388,34.163 57.277,34.163 59.309,34.163 60.198,34.163 63.627,34.163 64.516,34.163 52.07,34.925 52.959,34.925 56.388,34.925 57.277,34.925 59.309,34.925 60.198,34.925 63.627,34.925 64.516,34.925 52.07,35.687 52.959,35.687 56.261,35.687 57.277,35.687 59.309,35.687 60.198,35.687 63.5,35.687 64.516,35.687 54.229,36.322 55.245,36.322 61.468,36.322 62.484,36.322 35.969,41.146 36.604,41.146
  other v2: 17.907,29.718 17.907,34.713
pads on no net: J1.1 J1.2 J1.4 J1.5 J1.7 J1.8 J1.10 J1.11 J1.13 J1.14 J1.15 J1.17 J1.18 J1.20 J1.21 J1.23 J1.24 J1.26 J1.27 J1.29 J1.30 J1.31 J1.41 J1.42 J1.43 J1.44 J1.45 J1.46 J1.47 J1.48 J1.49 J1.54 J1.55 J1.57 J1.58 J1.69 J1.70 J1.71 J1.81 J1.82 U1.8 U2.8 U3.8 U4.4

## Polygon pours and split planes (outlines as drawn)
GND on Top Layer "PWR_PLANE" (solid, remove dead copper, pour order 28): 13.97,48.641 183.515,48.641 183.515,25.824 183.472,25.781 13.97,25.781
VDD_IN on Top Layer "PWR_PLANE" (solid, pour order 24): 15.494,37.338 22.733,37.338 22.733,32.385 31.479,32.385 31.492,27.305 15.494,27.305
VDD_IN on Top Layer "PWR_PLANE" (solid, pour order 26): 51.181,37.338 67.056,37.338 67.056,34.738 83.185,34.738 83.185,29.718 51.181,29.718
NetC27_2 on Top Layer "PWR_PLANE" (solid, pour order 23): 39.536,30.099 39.536,40.894 45.251,40.894 45.251,30.099
NetC22_1 on Top Layer "PWR_PLANE" (solid, pour order 22): 38.396,36.424 36.872,36.424 36.872,34.694 38.396,34.694
NetC30_2 on Top Layer "DIRCON" (solid, pour order 21): 34.234,36.181 34.234,35.928 32.227,35.928 32.227,36.464 33.086,36.464 33.369,36.181
NetC22_2 on Top Layer "DIRCON" (solid, pour order 20): 34.772,36.155 34.772,36.705 34.212,37.266 34.212,38.118 33.623,38.118 33.623,37.305 34.512,36.416 34.512,36.155
NetC22_1 on Top Layer "PWR_PLANE" (solid, pour order 19): 35.276,38.117 34.51,38.117 34.51,37.327 35.021,37.327 35.021,35.433 35.276,35.433
VDD_IN on Top Layer "PWR_PLANE" (solid, pour order 18): 35.528,36.147 35.528,41.516 36.925,41.516 36.925,38.722 36.29,38.087 36.29,37.452 35.909,37.071 35.909,36.147
VDD_IN on Top Layer "PWR_PLANE" (solid, pour order 17): 35.528,34.969 35.528,29.6 36.925,29.6 36.925,32.394 36.29,33.029 36.29,33.664 35.909,34.045 35.909,34.969
NetC1_1 on Top Layer "PWR_PLANE" (solid, pour order 16): 154.876,35.641 154.876,34.117 156.607,34.117 156.607,35.641
NetC13_1 on Top Layer "PWR_PLANE" (solid, pour order 15): 142.137,35.687 142.137,34.163 143.865,34.163 143.865,35.687
NetC9_2 on Top Layer "DIRCON" (solid, pour order 14): 155.119,31.48 155.372,31.48 155.372,29.472 154.836,29.472 154.836,30.331 155.119,30.615
NetC1_2 on Top Layer "DIRCON" (solid, pour order 13): 155.145,32.018 154.595,32.018 154.035,31.457 153.182,31.457 153.182,30.868 153.995,30.868 154.884,31.757 155.145,31.757
NetC1_1 on Top Layer "PWR_PLANE" (solid, pour order 12): 153.184,32.521 153.184,31.755 153.973,31.755 153.973,32.266 155.868,32.266 155.868,32.521
VDD_5V_2 on Top Layer "PWR_PLANE" (solid, pour order 6): 139.954,36.703 146.939,36.703 146.939,45.72 139.954,45.72
NetC13_2 on Top Layer "DIRCON" (solid, pour order 11): 142.394,32.011 141.844,32.011 141.283,31.45 140.431,31.45 140.431,30.861 141.244,30.861 142.133,31.75 142.394,31.75
NetC21_2 on Top Layer "DIRCON" (solid, pour order 10): 142.368,31.473 142.621,31.473 142.621,29.465 142.085,29.465 142.085,30.325 142.368,30.608
NetC13_1 on Top Layer "PWR_PLANE" (solid, pour order 9): 140.434,32.516 140.434,31.75 141.224,31.75 141.224,32.261 143.118,32.261 143.118,32.516
VDD_IN on Top Layer "PWR_PLANE" (solid, pour order 2): 142.402,32.766 137.033,32.766 137.033,34.163 139.827,34.163 140.462,33.528 141.097,33.528 141.466,33.159 142.402,33.159
VDD_IN on Top Layer "PWR_PLANE" (solid, pour order 3): 143.58,32.766 148.949,32.766 148.949,34.163 146.155,34.163 145.52,33.528 144.885,33.528 144.521,33.164 143.58,33.164
VDD_5V_1 on Top Layer "PWR_PLANE" (solid, pour order 8): 152.654,36.633 159.766,36.633 159.766,45.847 152.654,45.847
VDD_IN on Top Layer "PWR_PLANE" (solid, pour order 5): 155.153,32.773 149.784,32.773 149.784,34.17 152.578,34.17 153.213,33.535 153.848,33.535 154.229,33.154 155.153,33.154
VDD_IN on Top Layer "PWR_PLANE" (solid, pour order 4): 156.332,32.773 161.7,32.773 161.7,34.17 158.906,34.17 158.271,33.535 157.636,33.535 157.255,33.154 156.332,33.154
GND on Bottom Layer "PWR_PLANE" (solid, remove dead copper, pour order 32): 13.843,48.641 183.388,48.641 183.388,25.697 183.345,25.654 13.843,25.654
VDD_IN on Bottom Layer "PWR_PLANE" (solid, remove dead copper, pour order 31): 161.671,30.861 161.671,34.163 147.066,34.163 147.066,32.766 137.922,32.766 137.922,35.814 69.342,35.814 69.342,33.655 130.937,33.655 135.382,33.655 135.382,30.861
VDD_IN on Bottom Layer "PWR_PLANE" (solid, pour order 30): 15.621,36.83 22.733,36.83 22.733,32.385 31.75,32.385 31.75,29.083 35.438,29.077 35.431,42.418 37.211,42.418 37.211,29.083 46.736,29.083 47.879,30.226 47.879,38.354 69.723,38.354 72.771,35.306 83.058,35.306 83.312,35.052 83.312,30.734 82.423,29.845 59.817,29.845 56.642,26.67 15.621,26.67

## Silkscreen, mask and mechanical layers (free items; w line width, h text height)
Top Overlay:
  text "5V0" at 153.035,38.989 h1
  text "GND" at 156.845,38.989 h1
  text "3V3" at 166.878,38.989 h1
  text "GND" at 170.815,38.989 h1
  text "3V3" at 175.133,38.989 h1
  text "GND" at 178.943,38.989 h1
  text "12V" at 47.752,38.862 h1
  text "GND" at 50.927,38.862 h1
  text "5V0" at 140.208,38.735 h1
  text "GND" at 144.018,38.735 h1
  text "USB3" at 82.165,38.481 h1
  text "USB2" at 96.806,38.354 h1
  text "USB1" at 111.481,38.367 h1
  text "UART" at 126.587,38.354 h1
  text "PD" at 71.374,37.592 h1 r90
  text "PD" at 56.642,37.211 h1
  text "PWR" at 59.944,37.084 h1
  text "5V + - GND" at 79.371,37.084 h1
  text "PWR" at 66.04,36.957 h1 r90
  text "5V + - GND" at 94.012,36.957 h1
  text "5V + - GND" at 108.687,36.97 h1
  text "3V3 RX TX GND" at 122.174,36.957 h1
  text "FAN_EN" at 74.001,35.052 h1 r90
  text "EXT_ON" at 68.54,34.798 h1 r90
Mechanical 1:
  the board outline again, w0.254

## Text inside footprints (layer, text, board x,y; h text height)
J1: Mechanical 7 "-0.12in/-3.048mm" at 135.839,27.749 h0.64 r180; Mechanical 7 "-0.27in/-6.858mm" at 133.299,29.654 h0.64 r180; Mechanical 7 "0.295in/7.493mm" at 56.502,22.479 h0.64 r180; Mechanical 7 "0.324in/8.23mm" at 49.2,30.34 h0.64 r180; Mechanical 7 "0.157in/3.988mm" at 59.042,28.219 h0.64 r180; Mechanical 7 "2.496in/63.398mm" at 96.012,7.747 h0.64 r180; Mechanical 7 "2.35in/59.69mm" at 96.329,10.287 h0.64 r180; Mechanical 7 "2.35in/59.69mm" at 96.329,12.827 h0.64 r180; Mechanical 7 "Alt 2 Padstyle:OX90Y60D30P" at 90.297,40.742 h1.27 r180; Mechanical 7 "Alt 1 Padstyle:OX60Y90D30P" at 90.297,39.472 h1.27 r180; Mechanical 7 "Default Padstyle:EX55Y55D32P" at 89.662,38.202 h1.27 r180